# EAGLE board Catch The Light Game (EAGLE 9.6.2)
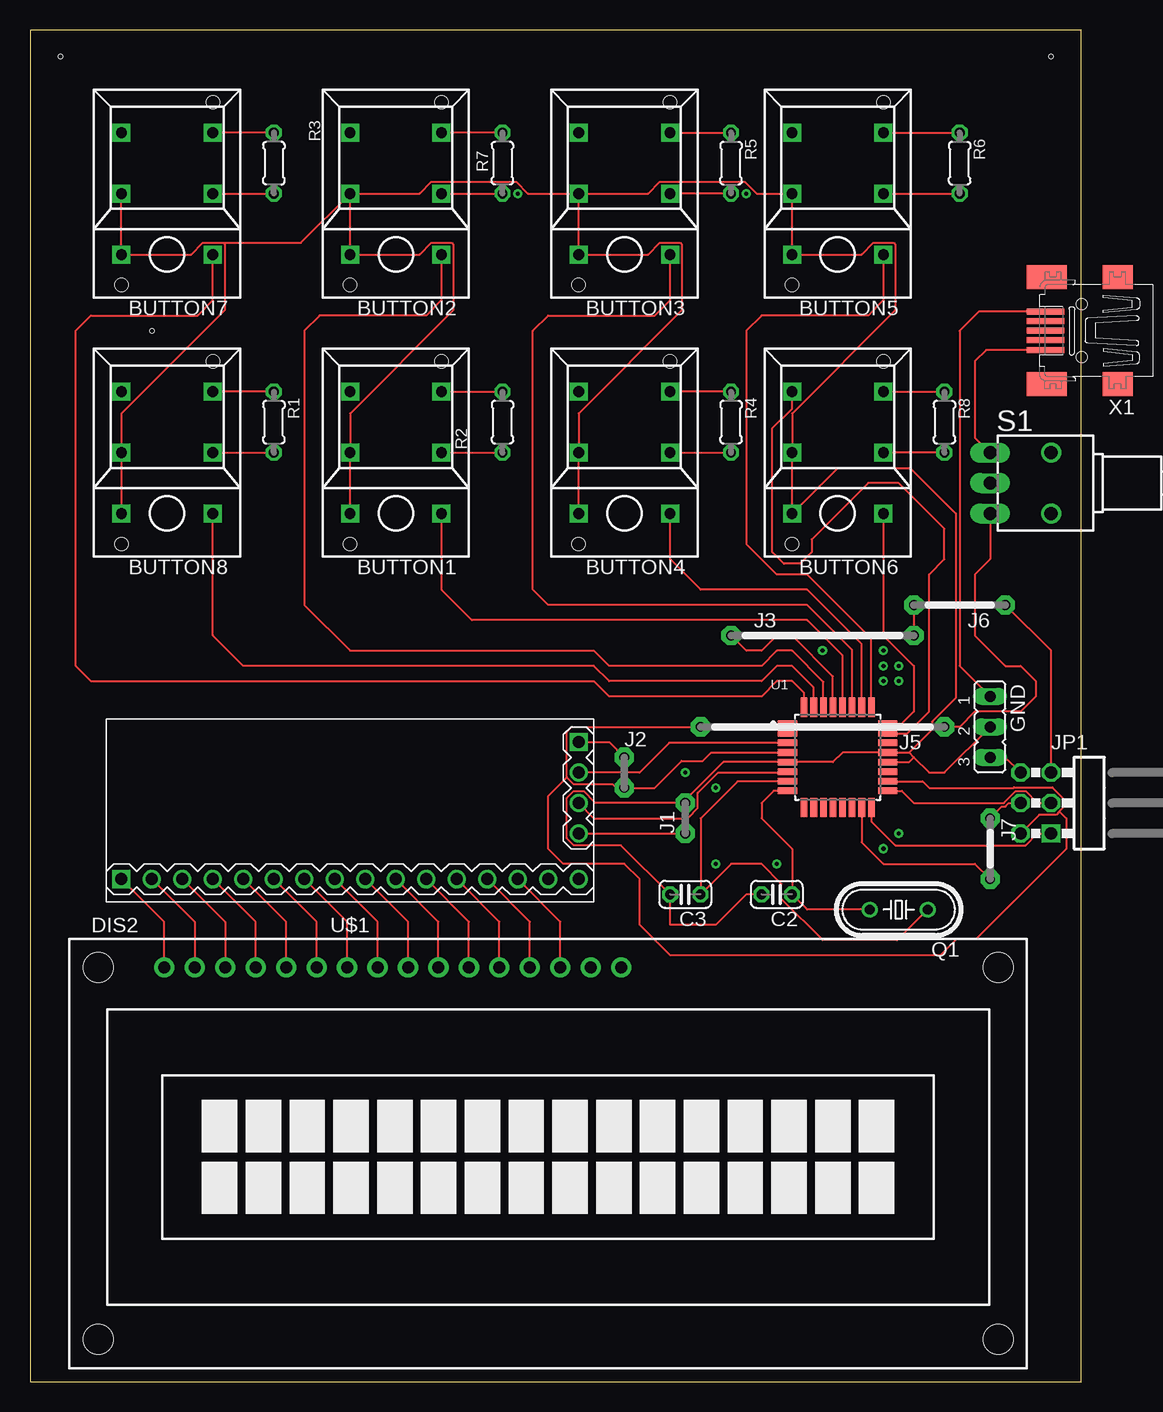
[diagram p0: board, top side]
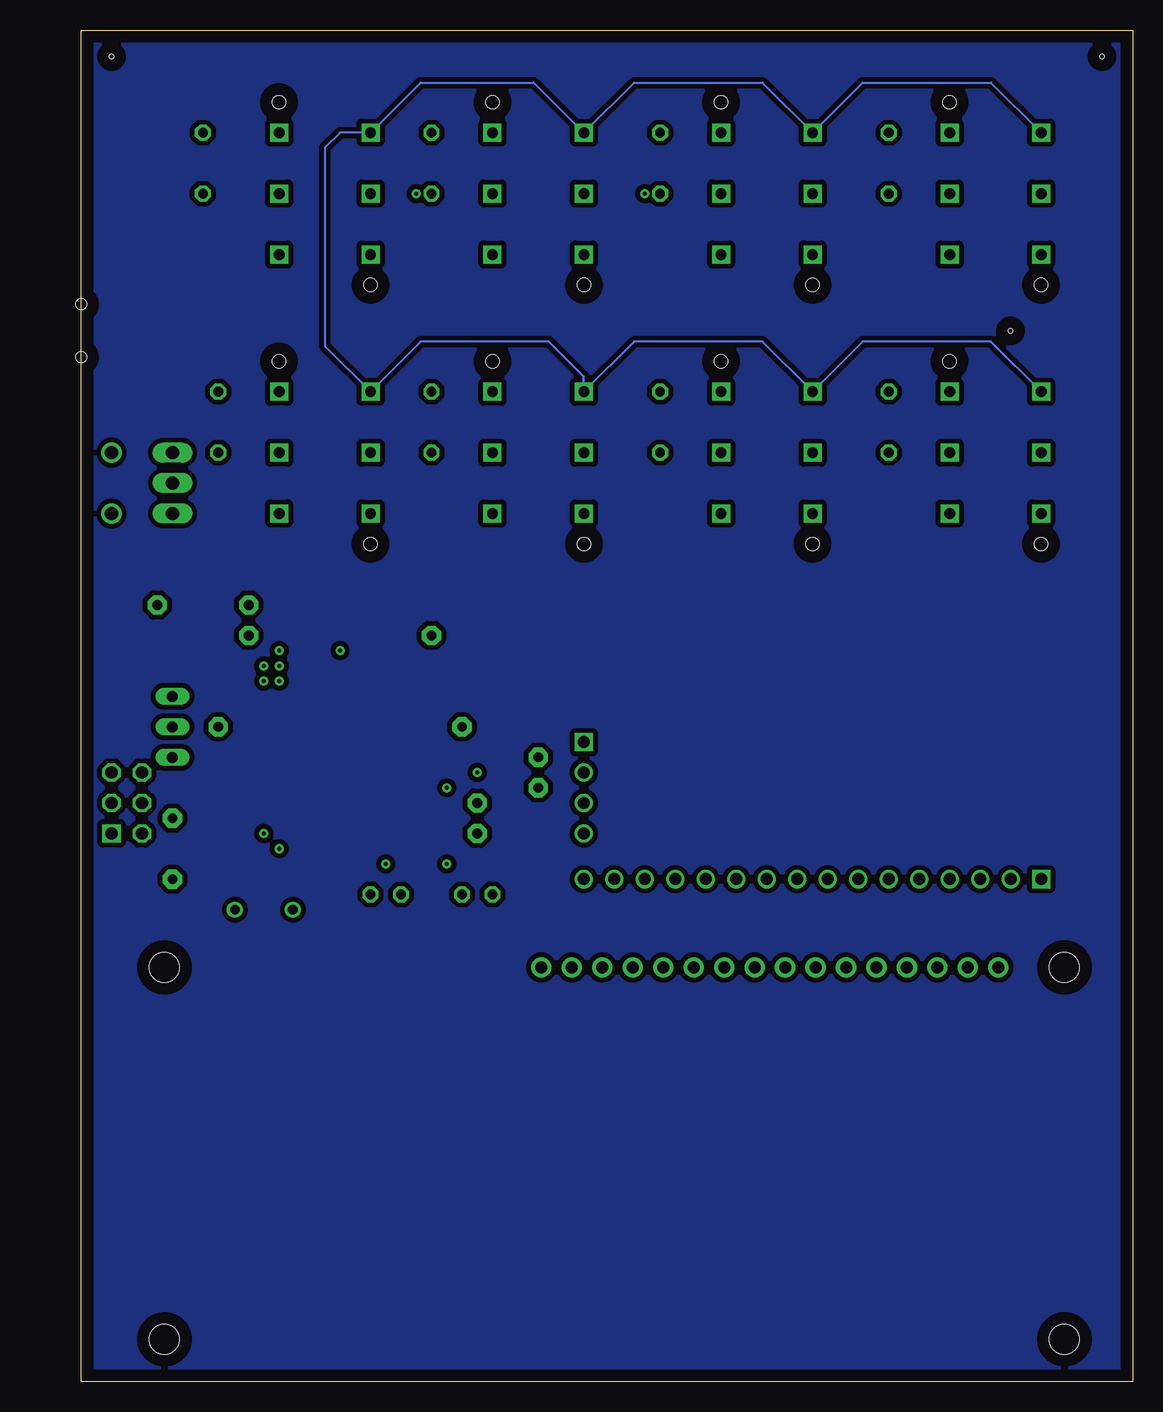
[diagram p1: board, bottom side, seen from below]

Size 87.61 x 112.7 mm. Coordinates in mm from the lower left corner, seen from the top.
Outline: 0,0 87.61,0 87.61,112.7 0,112.7 0,0
Copper layers (1*16): Top 0.035mm / dielectric 1.5mm / Bottom 0.035mm
Design rules "default": minimum track width 6mil, minimum drill 0.35mm, track to track 6mil, track to pad 6mil, pad to pad 6mil, via to via 6mil, smd to smd 6mil, copper to edge 40mil, drill to drill 6mil, minimum pad ring 10mil, minimum via ring 8mil, stop-mask expansion 4mil, vias tented up to drill 0mil, thermal gap 10mil
Holes 0.35 mm at 2.54,110.49 85.09,110.49 10.16,87.63

## Footprints (pad centres in the part's own frame; a part is rotated, then mirrored left to right if it is on the bottom)
5501-1LED = drill 0.9 pad 1.5 square: 1A 0,3.81; 1B 0,-3.81; + -5.08,-3.81; - -5.08,3.81; NC 5.08,-3.81; NO 5.08,3.81 | hole 1.1: -7.62,3.81; 7.62,-3.81
C025-024X044 = drill 0.813 octagon: 1 -1.27,0; 2 1.27,0
TUXGR_16X2_R2 = drill 1 pad 1.676: 1 -32,15.5; 2 -29.46,15.5; 3 -26.92,15.5; 4 -24.38,15.5; 5 -21.84,15.5; 6 -19.3,15.5; 7 -16.76,15.5; 8 -14.22,15.5; 9 -11.68,15.5; 10 -9.14,15.5; 11 -6.6,15.5; 12 -4.06,15.5; 13 -1.52,15.5; 14 1.02,15.5; 15 3.56,15.5; 16 6.1,15.5 | hole 2.5: -37.5,-15.5; 37.5,-15.5; -37.5,15.5; 37.5,15.5
JP2 = drill 0.914 long: 1 -2.54,0; 2 0,0; 3 2.54,0
03 = drill 0.813 pad 1.6 octagon: 1 0,0; 2 2.54,0
15 = drill 0.813 pad 1.6 octagon: 1 -7.62,0; 2 7.62,0
20 = drill 0.813 pad 1.6 octagon: 1 -10.16,0; 2 10.16,0
07 = drill 0.813 pad 1.6 octagon: 1 -3.81,0; 2 3.81,0
05 = drill 0.813 pad 1.6 octagon: 1 -2.54,0; 2 2.54,0
AVR-ISP-6R = drill 1.016 square: 1 -2.54,-1.27 | drill 1.016 octagon: 2 -2.54,1.27; 3 0,-1.27; 4 0,1.27; 5 2.54,-1.27; 6 2.54,1.27
HC49/S = drill 0.813: 1 -2.413,0; 2 2.413,0
0204/5 = drill 0.813 octagon: 1 -2.54,0; 2 2.54,0
TL3XWO = drill 1.1 pad 1.422 long: 1 -2.54,-5.08; 2 0,-5.08; 3 2.54,-5.08 | drill 1.1 pad 1.676: M1 -2.54,0; M2 2.54,0
QFP80P900X900X120-32N = smd 1.6 x 0.55: 1 -4.18,2.8; 2 -4.18,2; 3 -4.18,1.2; 4 -4.18,0.4; 5 -4.18,-0.4; 6 -4.18,-1.2; 7 -4.18,-2; 8 -4.18,-2.8; 17 4.18,-2.8; 18 4.18,-2; 19 4.18,-1.2; 20 4.18,-0.4; 21 4.18,0.4; 22 4.18,1.2; 23 4.18,2; 24 4.18,2.8 | smd 0.55 x 1.6: 9 -2.8,-4.18; 10 -2,-4.18; 11 -1.2,-4.18; 12 -0.4,-4.18; 13 0.4,-4.18; 14 1.2,-4.18; 15 2,-4.18; 16 2.8,-4.18; 25 2.8,4.18; 26 2,4.18; 27 1.2,4.18; 28 0.4,4.18; 29 -0.4,4.18; 30 -1.2,4.18; 31 -2,4.18; 32 -2.8,4.18
LCD-I2C-CONVERTER = drill 1 square: J1.1 -19.05,-5.08; J2.1 19.05,6.35 | drill 1: J1.2 -19.05,-2.54; J1.3 -19.05,0; J1.4 -19.05,2.54; J2.2 16.51,6.35; J2.3 13.97,6.35; J2.4 11.43,6.35; J2.5 8.89,6.35; J2.6 6.35,6.35; J2.7 3.81,6.35; J2.8 1.27,6.35; J2.9 -1.27,6.35; J2.10 -3.81,6.35; J2.11 -6.35,6.35; J2.12 -8.89,6.35; J2.13 -11.43,6.35; J2.14 -13.97,6.35; J2.15 -16.51,6.35; J2.16 -19.05,6.35
32005-201 = smd 3.1 x 0.5: 1 3,1.6; 2 3,0.8; 3 3,0; 4 3,-0.8; 5 3,-1.6 | smd 2.5 x 2: M1 -3,-4.45; M2 -3,4.45 | smd 3.3 x 2: M3 2.9,4.45; M4 2.9,-4.45 | hole 0.9: 0,2.2; 0,-2.2

## Placement (x,y rotation side)
BUTTON1  GREEN  [5501-1LED]  30.48,77.47 90 top
BUTTON2  GREEN  [5501-1LED]  30.48,99.06 90 top
BUTTON3  GREEN  [5501-1LED]  49.53,99.06 90 top
BUTTON4  GREEN  [5501-1LED]  49.53,77.47 90 top
BUTTON5  GREEN  [5501-1LED]  67.31,99.06 90 top
BUTTON6  GREEN  [5501-1LED]  67.31,77.47 90 top
BUTTON7  GREEN  [5501-1LED]  11.43,99.06 90 top
BUTTON8  GREEN  [5501-1LED]  11.43,77.47 90 top
C2  6 pF  [C025-024X044]  62.23,40.64 180 top
C3  6 pF  [C025-024X044]  54.61,40.64 180 top
DIS2  TUXGR_16X2_R2  [TUXGR_16X2_R2]  43.18,19.05 0 top
GND  [JP2]  80.01,54.61 270 top
J1  J3MM  [03]  54.61,45.72 90 top
J2  J3MM  [03]  49.53,52.07 270 top
J3  J15MM  [15]  66.04,62.23 0 top
J5  J20MM  [20]  66.04,54.61 180 top
J6  J7MM  [07]  77.47,64.77 180 top
J7  J5MM  [05]  80.01,44.45 270 top
JP1  AVR-ISP-6R  [AVR-ISP-6R]  83.82,48.26 90 top
Q1  16 MHz  [HC49/S]  72.39,39.37 180 top
R1  150 ohms  [0204/5]  20.32,80.01 270 top
R2  150 ohms  [0204/5]  39.37,80.01 270 top
R3  150 ohms  [0204/5]  20.32,101.6 90 top
R4  150 ohms  [0204/5]  58.42,80.01 270 top
R5  150 ohms  [0204/5]  58.42,101.6 270 top
R6  150 ohms  [0204/5]  77.47,101.6 270 top
R7  150 ohms  [0204/5]  39.37,101.6 90 top
R8  150 ohms  [0204/5]  76.2,80.01 270 top
S1  TL32WO  [TL3XWO]  85.09,74.93 270 top
U1  ATMEGA328PB-AU  [QFP80P900X900X120-32N]  67.31,52.07 0 top
U$1  LCD-I2C-CONVERTER  [LCD-I2C-CONVERTER]  26.67,48.26 180 top
X1  MINI-USB-SCHIELD-32005-201  [32005-201]  87.63,87.63 180 top

## Library data of the parts
BUTTON1-BUTTON8 S1 = switch
C2 C3 = rcl; SPICEPREFIX: C
DIS2 = display-lcd; OC_FARNELL: unknown; OC_NEWARK: unknown; SPICEPREFIX: X
GND J1-J3 J5-J7 = jumper
JP1 = atmel
Q1 = crystal; OC_FARNELL: 1667008; OC_NEWARK: unknown
R1-R8 = rcl; SPICEPREFIX: R
U1 = ATMEGA328PB-AU; AVAILABILITY: Good; DESCRIPTION: AVR AVR® ATmega Microcontroller IC 8-Bit 20MHz 32KB (16K x 16) FLASH 32-TQFP (7x7); MF: Microchip Technology; MP: ATMEGA328PB-AU; PACKAGE: TQFP-32 Microchip Technology; PRICE: None; PURCHASE-URL: https://pricing.snapeda.com/search/part/ATMEGA328PB-AU/?ref=eda
U$1 = diy-modules; SPICEPREFIX: X
X1 = con-cypressindustries; OC_FARNELL: unknown; OC_NEWARK: unknown

## Nets
0: BUTTON1.1A BUTTON1.- BUTTON2.1A BUTTON2.- BUTTON3.1A BUTTON3.- BUTTON4.1A BUTTON4.- BUTTON5.1A BUTTON5.- BUTTON6.1A BUTTON6.- BUTTON7.1A BUTTON7.- BUTTON8.1A BUTTON8.- C2.2 C3.2 GND.2 J1.2 U1.5 U1.20 U1.21
+5V: J2.2 J5.2 JP1.2 U1.4 U1.18
N$1: DIS2.7 U$1.J2.7
N$2: DIS2.8 U$1.J2.8
N$3: DIS2.9 U$1.J2.9
N$4: DIS2.10 U$1.J2.10
N$5: DIS2.11 U$1.J2.11
N$6: DIS2.12 U$1.J2.12
N$7: DIS2.13 U$1.J2.13
N$8: JP1.3 U1.17
N$9: BUTTON7.NC R3.2
N$10: BUTTON4.NC R4.1
N$11: BUTTON3.+ U1.27
N$12: BUTTON2.+ U1.30
N$13: BUTTON2.NC R7.2
N$14: J7.2 U1.15
N$15: BUTTON3.1B R5.2
N$16: BUTTON4.1B R4.2
N$17: BUTTON2.1B R7.1
N$18: BUTTON1.1B R2.2
N$19: BUTTON5.1B R6.2
N$20: BUTTON6.NC R8.1
N$21: BUTTON6.+ U1.24
N$22: BUTTON8.1B R1.2
N$23: BUTTON5.+ U1.25
N$24: BUTTON4.+ U1.26
N$25: DIS2.14 U$1.J2.14
N$26: DIS2.4 U$1.J2.4
N$27: GND.1 X1.5
N$28: DIS2.5 U$1.J2.5
N$29: DIS2.6 U$1.J2.6
N$30: BUTTON1.+ U1.28
N$31: BUTTON8.+ U1.31
N$32: JP1.1 U1.16
N$33: J2.1 U$1.J1.1
N$34: DIS2.1 U$1.J2.1
N$35: DIS2.2 U$1.J2.2
N$36: DIS2.3 U$1.J2.3
N$37: U1.3 U$1.J1.2
N$40: BUTTON1.NO BUTTON2.NO BUTTON3.NO BUTTON4.NO BUTTON5.NO BUTTON6.NO BUTTON7.NO BUTTON8.NO U1.23
N$41: BUTTON6.1B R8.2
N$42: BUTTON1.NC R2.1
N$43: BUTTON5.NC R6.1
N$44: BUTTON3.NC R5.1
N$45: S1.1 X1.1
N$46: J6.1 JP1.5
N$47: U1.6 U$1.J1.3
N$49: J1.1 U$1.J1.4
N$50: C2.1 Q1.2 U1.8
N$51: C3.1 Q1.1 U1.7
N$52: J3.1 U1.29
N$53: GND.3 JP1.6
N$54: J7.1 JP1.4
N$55: BUTTON7.+ U1.32
N$56: J5.1 S1.3
N$58: J3.2 J6.2
N$181: BUTTON7.1B R3.1
N$182: BUTTON8.NC R1.1

## Tracks (layer width: path | path; a pad name or v marks a point on that pad's centre or on a via)
0
  Top 0.152: BUTTON1.- BUTTON1.1A 26.67,80.73 35.27,89.33 35.27,94.83 35.13,94.96 33.45,94.96 32.47,93.98 BUTTON2.- BUTTON2.1A | BUTTON4.- BUTTON4.1A 45.72,80.73 54.32,89.33 54.32,94.83 54.19,94.96 52.49,94.96 51.52,93.98 BUTTON3.- BUTTON3.1A | BUTTON7.1A BUTTON7.- 13.42,93.98 14.39,94.96 16.09,94.96 | BUTTON8.- BUTTON8.1A 7.62,80.73 16.22,89.33 16.22,94.83 16.09,94.96 | BUTTON2.1A 22.57,94.96 16.09,94.96 | BUTTON2.1A 32.47,99.06 33.45,100.04 40.52,100.04 41.5,99.06 BUTTON3.1A | BUTTON3.1A 51.52,99.06 52.49,100.04 59.57,100.04 60.55,99.06 BUTTON5.1A BUTTON5.- 69.3,93.98 70.28,94.96 71.97,94.96 72.1,94.83 72.1,89.33 63.5,80.73 BUTTON6.1A BUTTON6.- 67.31,76.2 73.36,76.2 77.17,72.39 77.17,57.03 75.17,55.04 75.17,54.38 73.26,52.47 | 73.26,52.47 U1.21 67.71,52.47 66.91,51.67 U1.5 57.77,51.67 54.61,48.51 J1.2 54.55,48.32 47.05,48.32 46.13,49.24 45.31,49.24 44.74,48.67 44.74,45.31 45.31,44.74 49.24,44.74 C3.2 53.34,38.1 57.15,38.1 59.69,40.64 C2.2 | 73.26,52.47 73.66,52.07 | 73.66,52.07 74.93,50.8 76.2,50.8 GND.2 | U1.20 73.26,51.67 73.66,52.07
+5V
  Top 0.152: U1.18 74.39,50.07 74.93,49.53 81.99,49.53 82.01,49.55 85.2,49.55 86.08,48.67 86.08,47.85 85.79,47.56 | 85.79,47.56 85.5,47.27 84.1,47.27 JP1.2 | J5.2 45.16,54.61 44.74,54.19 44.74,50.39 | U1.4 56.78,52.47 56.08,51.77 54.3,51.77 52.07,49.53 J2.2 48.84,49.53 48.55,49.82 45.31,49.82 44.74,50.39 | 85.79,47.56 86.36,46.99 86.36,44.45 78.8,36.89 77.17,36.89 75.84,35.56 53.34,35.56 50.8,38.1 50.8,41.91 49.53,43.18 44.45,43.18 43.18,44.45 43.18,48.84 44.74,50.39
GND
  pour Bottom (isolate 0.406): 0,113.03 87.63,113.03 87.63,0 0,0
N$1
  Top 0.152: DIS2.7 26.42,38.35 U$1.J2.7
N$2
  Top 0.152: DIS2.8 28.96,38.35 U$1.J2.8
N$3
  Top 0.152: DIS2.9 31.5,38.35 U$1.J2.9
N$4
  Top 0.152: DIS2.10 34.04,38.35 U$1.J2.10
N$5
  Top 0.152: DIS2.11 36.58,38.35 U$1.J2.11
N$6
  Top 0.152: DIS2.12 39.12,38.35 U$1.J2.12
N$7
  Top 0.152: DIS2.13 41.66,38.35 U$1.J2.13
N$8
  Top 0.152: U1.17 72.65,49.27 73.66,48.26 81.15,48.26 82.14,49.25 82.96,49.25 83.95,48.26 JP1.3
N$9
  Top 0.152: R3.2 BUTTON7.NC
N$10
  Top 0.152: R4.1 BUTTON4.NC
N$11
  Top 0.152: U1.27 68.51,61.03 64.77,64.77 43.18,64.77 41.91,66.04 41.91,87.63 43.18,88.9 52.07,88.9 53.34,90.17 BUTTON3.+
N$12
  Top 0.152: U1.30 66.11,58.35 63.5,60.96 62.23,60.96 60.96,59.69 48.26,59.69 46.99,60.96 26.67,60.96 22.86,64.77 22.86,87.63 24.13,88.9 33.02,88.9 34.29,90.17 BUTTON2.+
N$13
  Top 0.152: R7.2 BUTTON2.NC
N$14
  Top 0.152: U1.15 69.31,44.99 71.12,43.18 78.74,43.18 J7.2
N$15
  Top 0.152: R5.2 BUTTON3.1B
N$16
  Top 0.152: BUTTON4.1B R4.2
N$17
  Top 0.152: BUTTON2.1B R7.1
N$18
  Top 0.152: BUTTON1.1B R2.2
N$19
  Top 0.152: BUTTON5.1B R6.2
N$20
  Top 0.152: BUTTON6.NC R8.1
N$21
  Top 0.152: U1.24 72.65,54.87 73.66,55.88 73.66,59.69 71.12,62.23 BUTTON6.+
N$22
  Top 0.152: BUTTON8.1B R1.2
N$23
  Top 0.152: U1.25 70.11,61.97 64.77,67.31 62.23,67.31 59.69,69.85 59.69,87.63 60.96,88.9 69.85,88.9 71.12,90.17 BUTTON5.+
N$24
  Top 0.152: U1.26 69.31,61.5 64.77,66.04 55.88,66.04 53.34,68.58 BUTTON4.+
N$25
  Top 0.152: DIS2.14 44.2,38.35 U$1.J2.14
N$26
  Top 0.152: DIS2.4 18.8,38.35 U$1.J2.4
N$27
  Top 0.152: X1.5 79.07,89.23 77.47,87.63 77.47,59.69 GND.1
N$28
  Top 0.152: DIS2.5 21.34,38.35 U$1.J2.5
N$29
  Top 0.152: DIS2.6 23.88,38.35 U$1.J2.6
N$30
  Top 0.152: U1.28 67.71,60.56 64.77,63.5 36.83,63.5 34.29,66.04 BUTTON1.+
N$31
  Top 0.152: U1.31 65.31,57.88 63.5,59.69 62.23,59.69 60.96,58.42 48.26,58.42 46.99,59.69 17.78,59.69 15.24,62.23 BUTTON8.+
N$32
  Top 0.152: U1.16 70.11,46.73 72.11,44.73 82.96,44.73 83.95,45.72 JP1.1
N$33
  Top 0.152: U$1.J1.1 48.26,53.34 J2.1
N$34
  Top 0.152: DIS2.1 11.18,38.35 U$1.J2.1
N$35
  Top 0.152: U$1.J2.2 13.72,38.35 DIS2.2
N$36
  Top 0.152: U$1.J2.3 16.26,38.35 DIS2.3
N$37
  Top 0.152: U1.3 53.27,53.27 50.8,50.8 U$1.J1.2
N$40
  Top 0.152: U1.23 73.12,54.07 74.93,55.88 74.93,67.31 76.2,68.58 76.2,71.12 72.39,74.93 69.85,74.93 65.14,70.22 65.14,69.17 64.66,68.69 64.18,68.21 62.82,68.21 61.86,69.17 61.86,79.52 63.5,81.16 BUTTON6.NO
  Bottom 0.152: BUTTON8.NO 11.8,86.73 22.49,86.73 BUTTON1.NO 30.85,86.73 41.54,86.73 BUTTON4.NO 45.72,83.82 48.63,86.73 59.32,86.73 BUTTON6.NO 67.31,86.36 67.31,102.87 66.04,104.14 BUTTON5.NO 59.32,108.32 49.9,108.32 BUTTON3.NO 41.54,108.32 30.85,108.32 BUTTON2.NO 22.49,108.32 11.8,108.32 BUTTON7.NO
N$41
  Top 0.152: R8.2 BUTTON6.1B
N$42
  Top 0.152: BUTTON1.NC R2.1
N$43
  Top 0.152: BUTTON5.NC R6.1
N$44
  Top 0.152: BUTTON3.NC R5.1
N$45
  Top 0.152: S1.1 78.74,78.74 78.74,85.09 79.68,86.03 X1.1
N$46
  Top 0.152: JP1.5 85.09,60.96 J6.1
N$47
  Top 0.152: U1.6 63.06,50.8 57.34,50.8 55.64,49.1 55.64,47.83 54.8,46.99 46.99,46.99 U$1.J1.3
N$49
  Top 0.152: U$1.J1.4 J1.1
N$50
  Top 0.152: U1.8 61.97,49.27 60.96,48.26 60.96,46.99 63.5,44.45 C2.1 64.77,39.37 Q1.2
N$51
  Top 0.152: U1.7 58.96,50.07 55.88,46.99 C3.1 58.42,43.18 60.96,43.18 62.61,41.53 62.61,40.27 66.05,36.83 72.26,36.83 Q1.1
N$52
  Top 0.152: J3.1 59.69,60.96 60.96,60.96 62.23,62.23 63.5,62.23 66.91,58.82 U1.29
N$53
  Top 0.152: JP1.6 81.28,52.07 GND.3
N$54
  Top 0.152: JP1.4 81.58,48.26 81.28,47.95 80.97,47.95 J7.1
N$55
  Top 0.152: U1.32 64.51,57.41 63.5,58.42 62.23,58.42 60.96,57.15 48.26,57.15 46.99,58.42 5.08,58.42 3.81,59.69 3.81,87.63 5.08,88.9 13.97,88.9 15.24,90.17 BUTTON7.+
N$56
  Top 0.152: J5.1 77.47,54.61 78.74,55.88 82.55,55.88 83.82,57.15 83.82,58.42 82.55,59.69 81.28,59.69 78.74,62.23 78.74,67.31 80.01,68.58 S1.3
N$58
  Top 0.152: J6.2 J3.2
N$139  (via drill 0.35)
  other vias: 40.64,99.06
N$140  (via drill 0.35)
  other vias: 59.69,99.06
N$168  (via drill 0.35)
  other vias: 66.04,60.96
N$169  (via drill 0.35)
  other vias: 71.12,60.96
N$170  (via drill 0.35)
  other vias: 71.12,59.69
N$171  (via drill 0.35)
  other vias: 71.12,58.42
N$172  (via drill 0.35)
  other vias: 72.39,59.69
N$173  (via drill 0.35)
  other vias: 72.39,58.42
N$174  (via drill 0.35)
  other vias: 57.15,49.53
N$175  (via drill 0.35)
  other vias: 54.61,50.8
N$177  (via drill 0.35)
  other vias: 57.15,43.18
N$178  (via drill 0.35)
  other vias: 62.23,43.18
N$179  (via drill 0.35)
  other vias: 71.12,44.45
N$180  (via drill 0.35)
  other vias: 72.39,45.72
N$181
  Top 0.152: BUTTON7.1B R3.1
N$182
  Top 0.152: R1.1 BUTTON8.NC